# Altium PCB DriveBoard.PcbDoc
Units mm, origin at the board's own origin, x right, y up, seen from the top; angles counter-clockwise.
Board outline 80 x 80 mm, 4 copper layers (Top Layer, PWR, GND, Bottom Layer), stack 0.603 mm thick; 28 components, 34 nets, 141 pads, 36 vias.
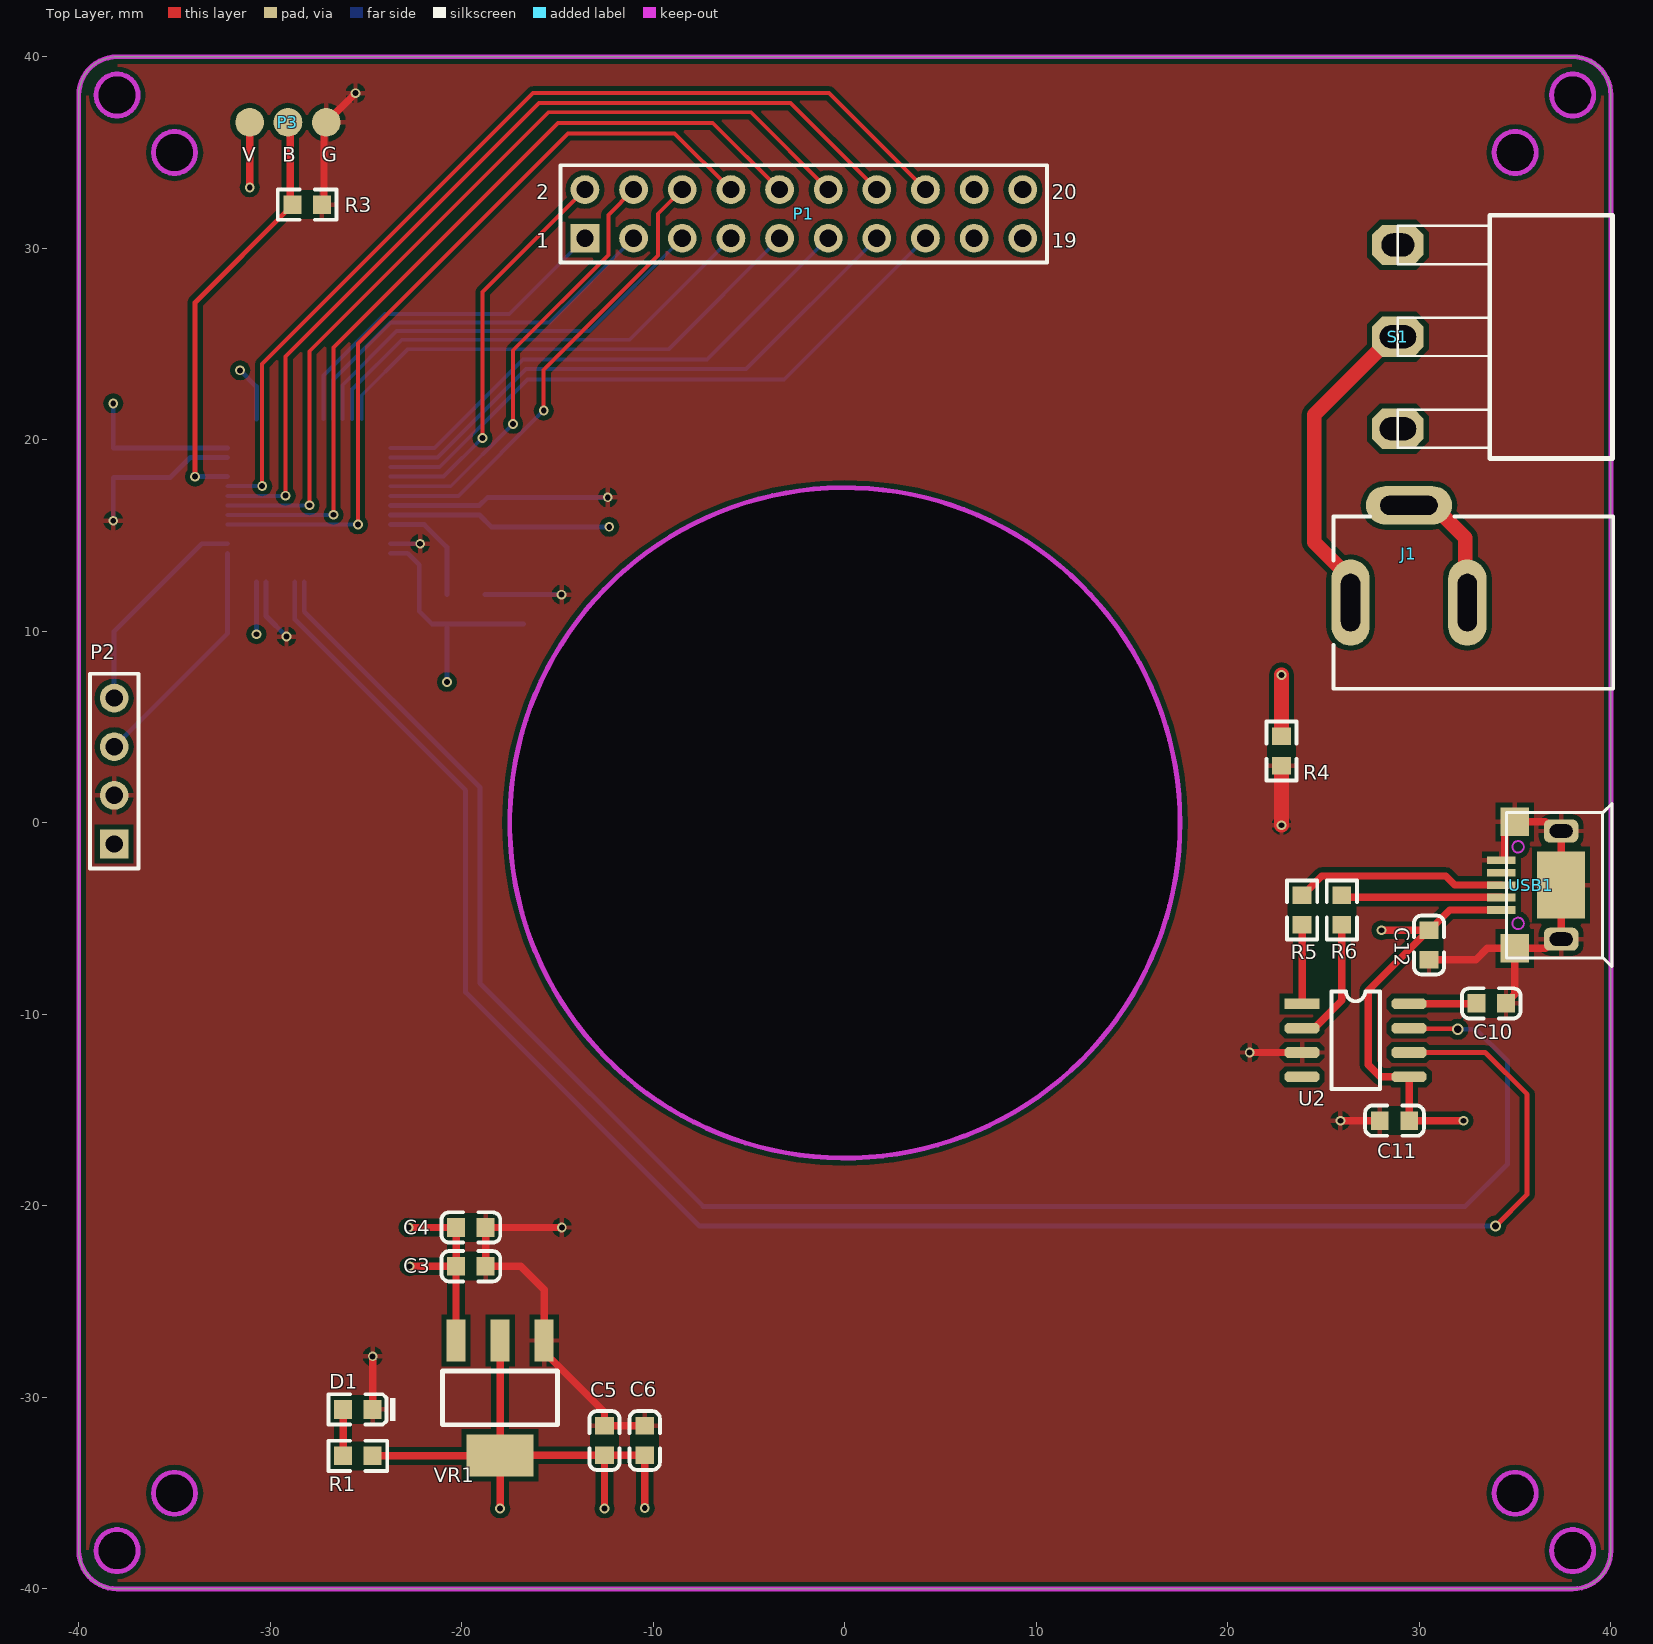
[diagram p0: Top Layer view]
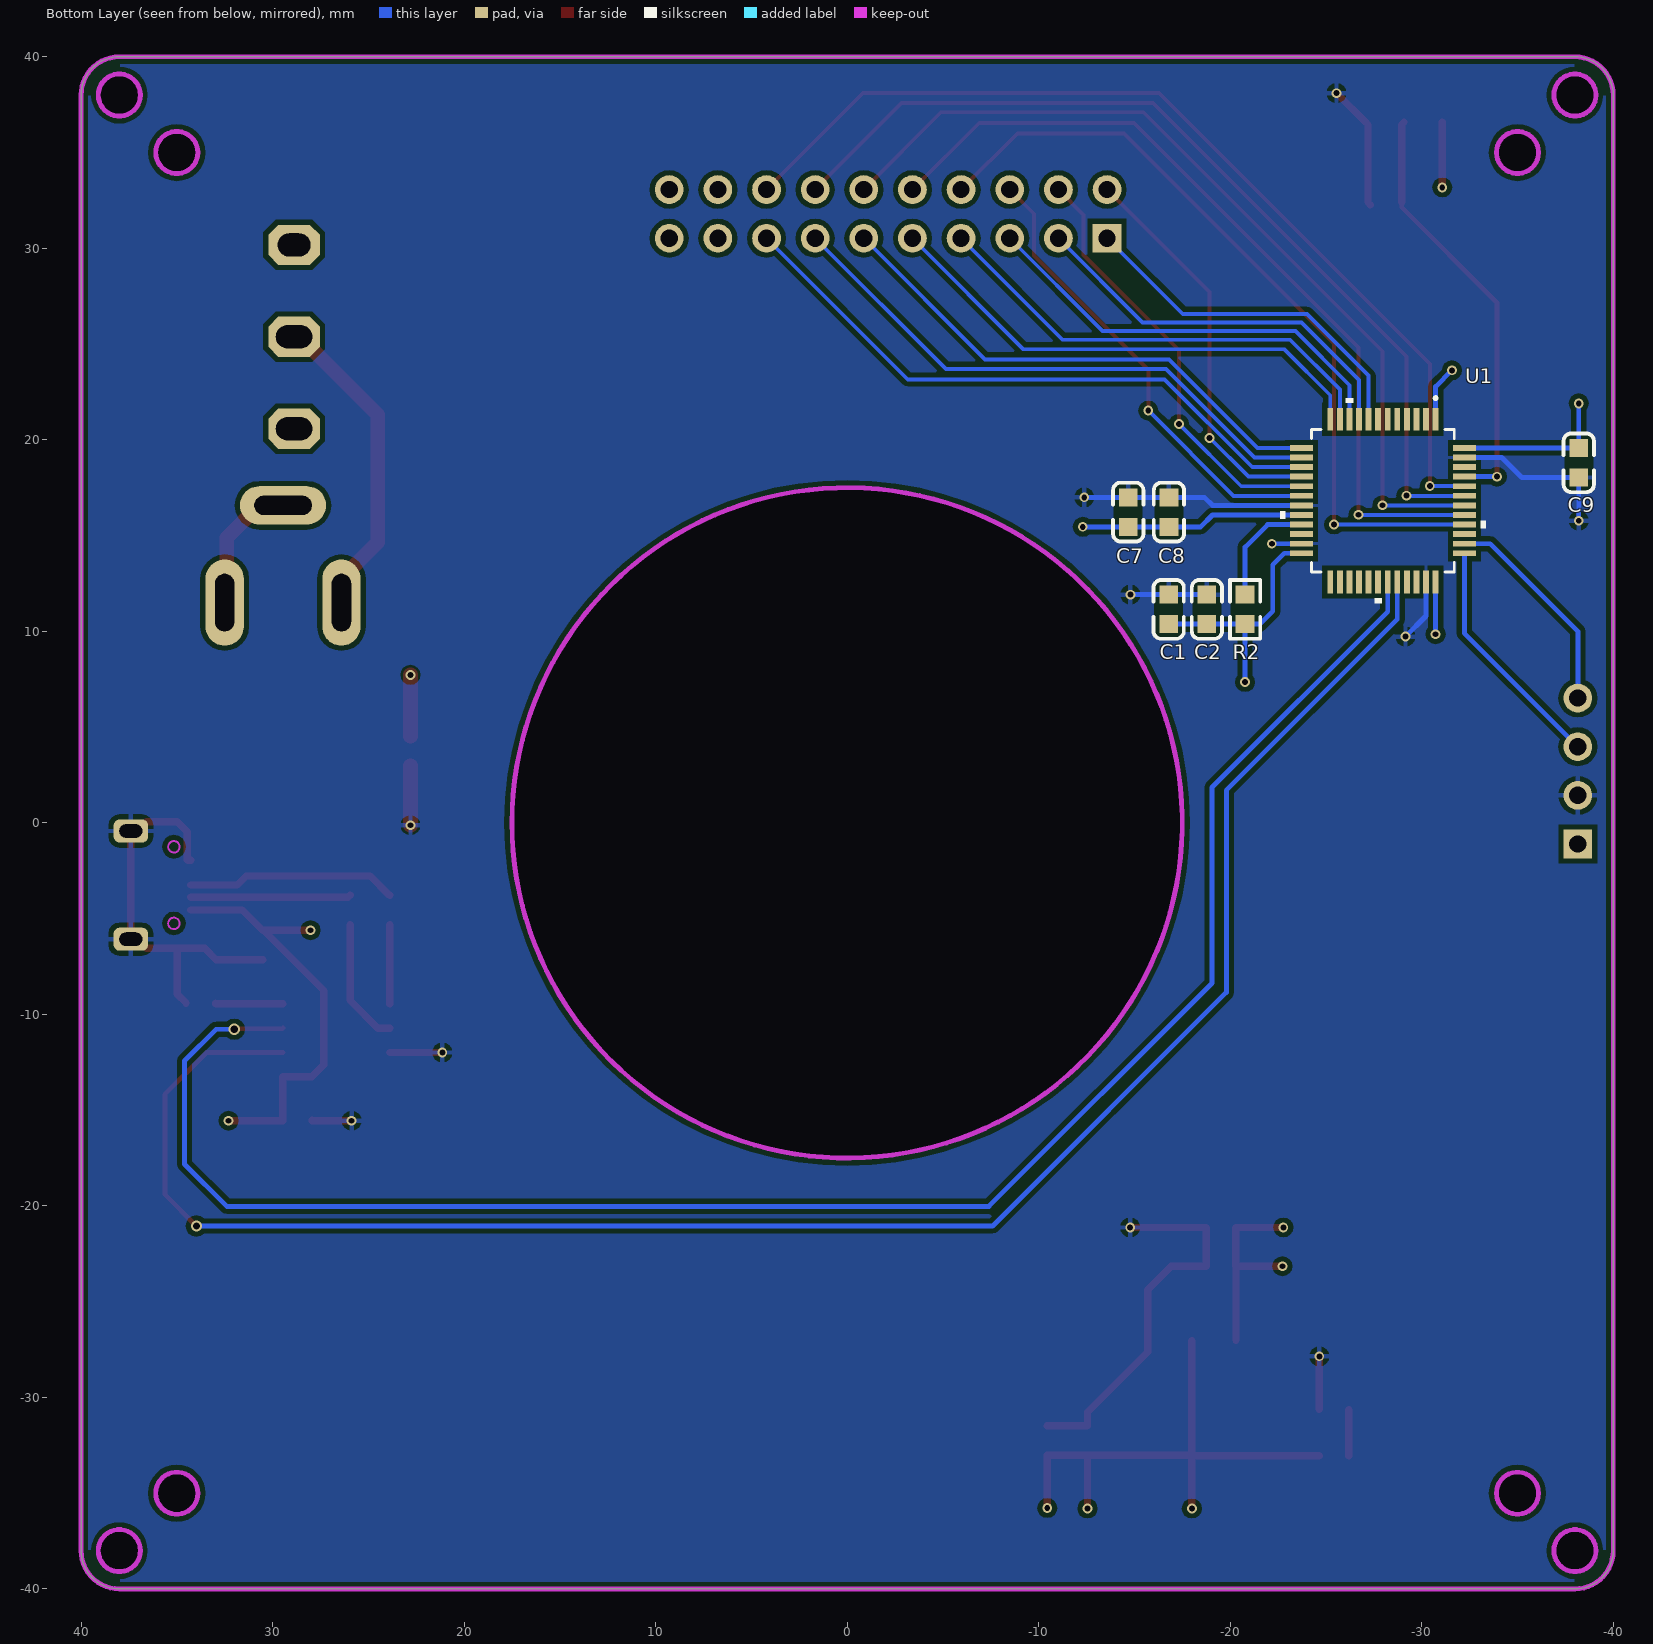
[diagram p1: Bottom Layer view, seen from below]
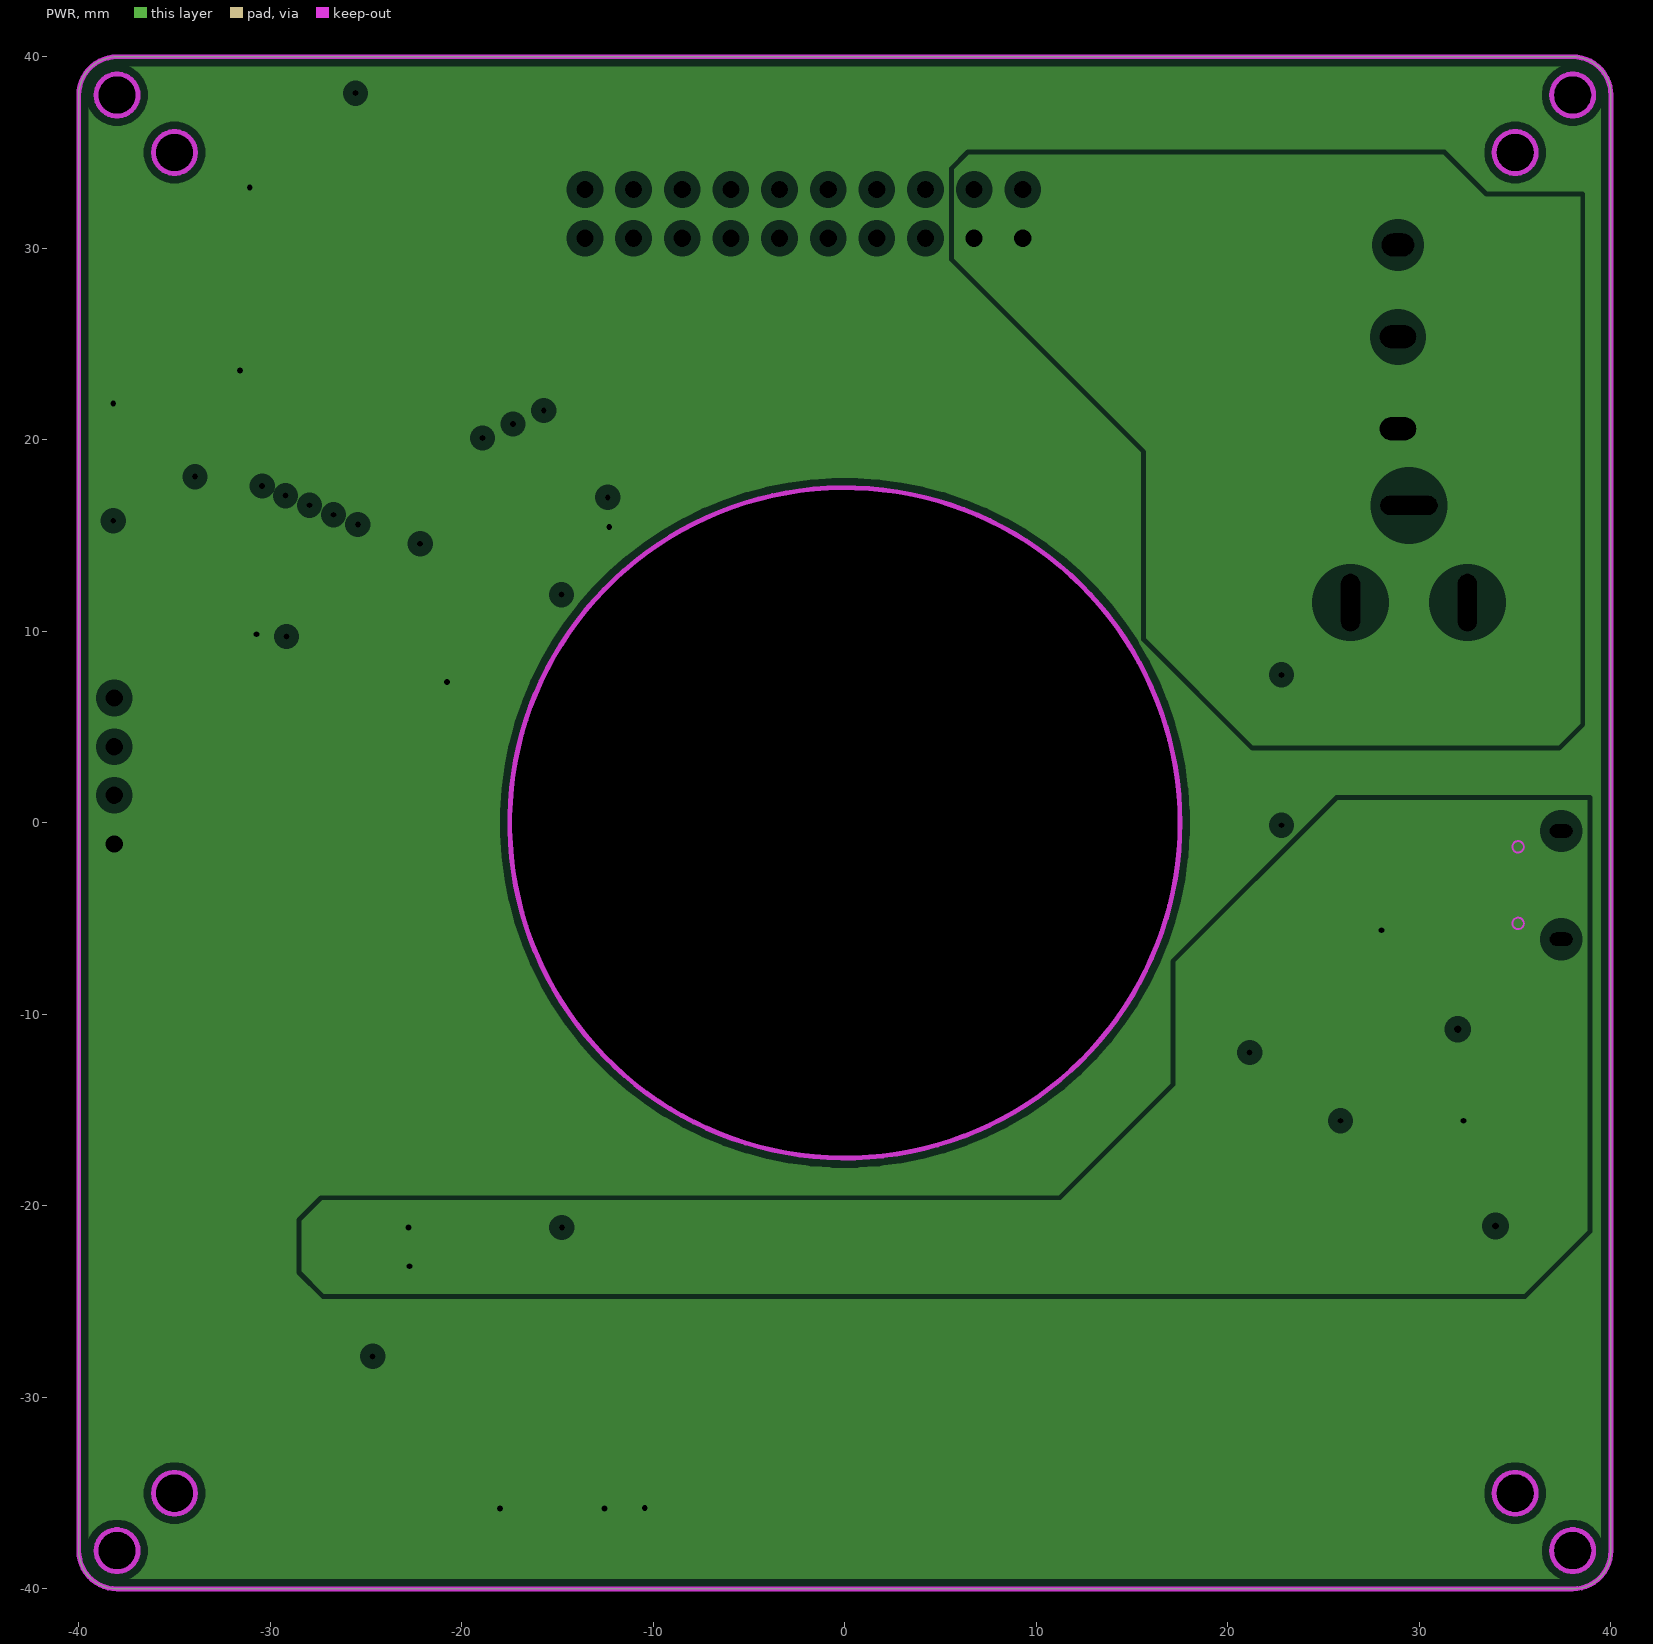
[diagram p2: PWR, clearances drawn from the general rule]
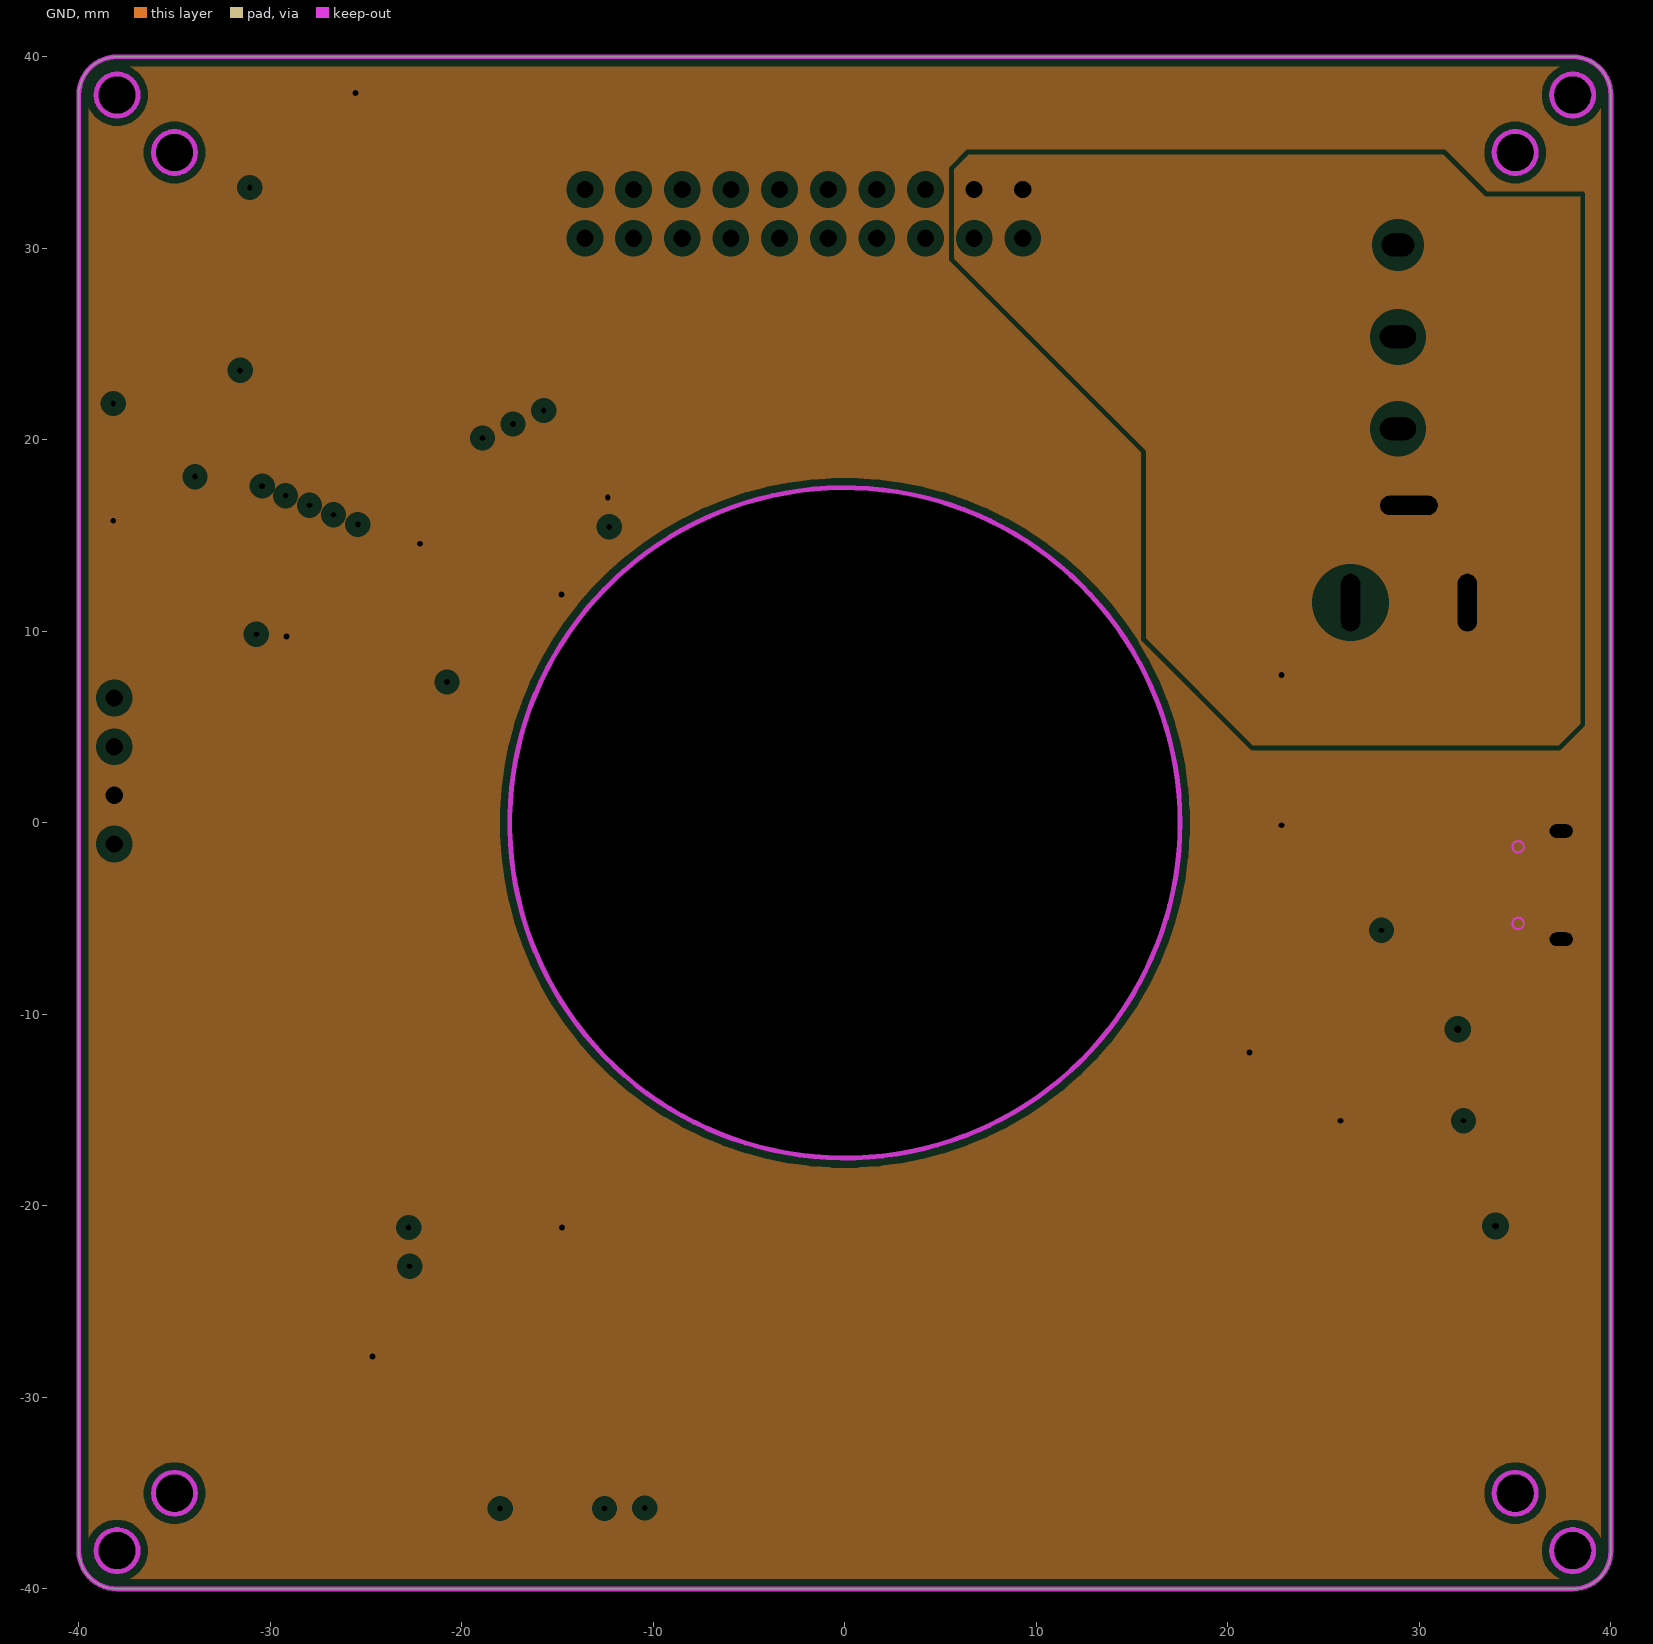
[diagram p3: GND, clearances drawn from the general rule]
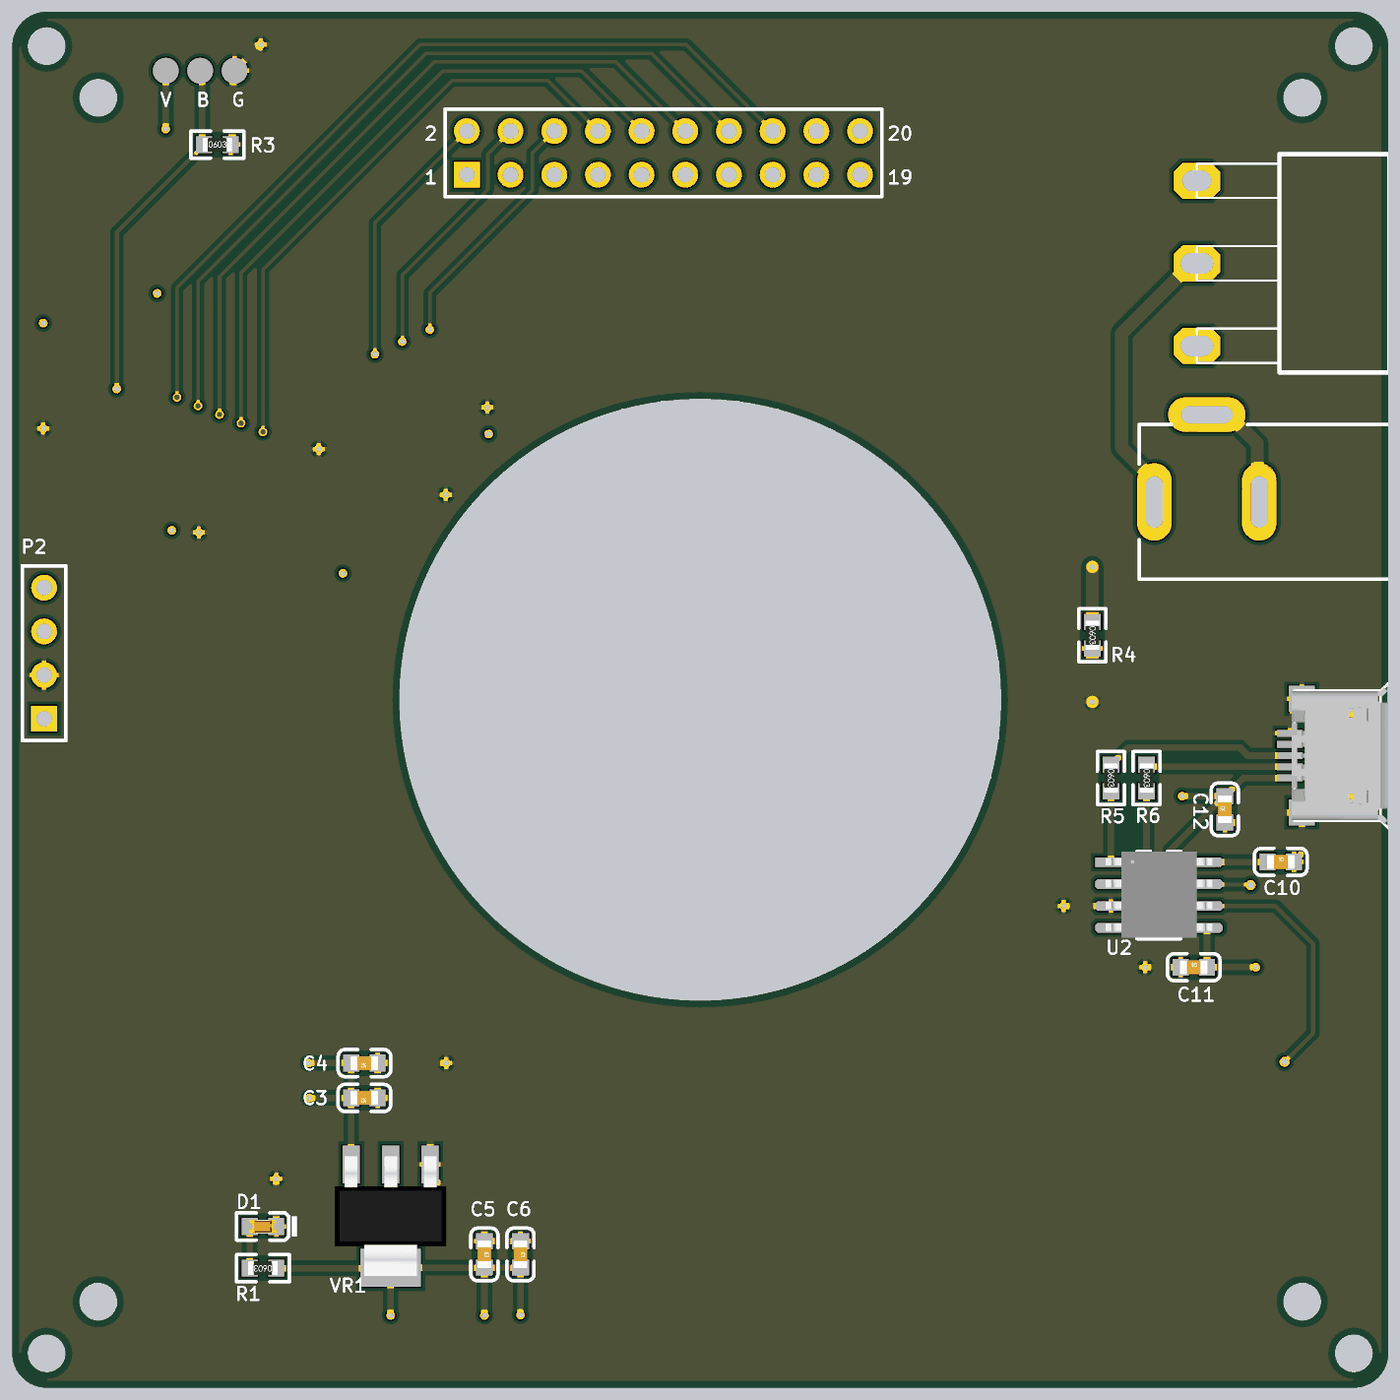
[diagram p4: 3D render of the assembled board from above, using the file's embedded part models]
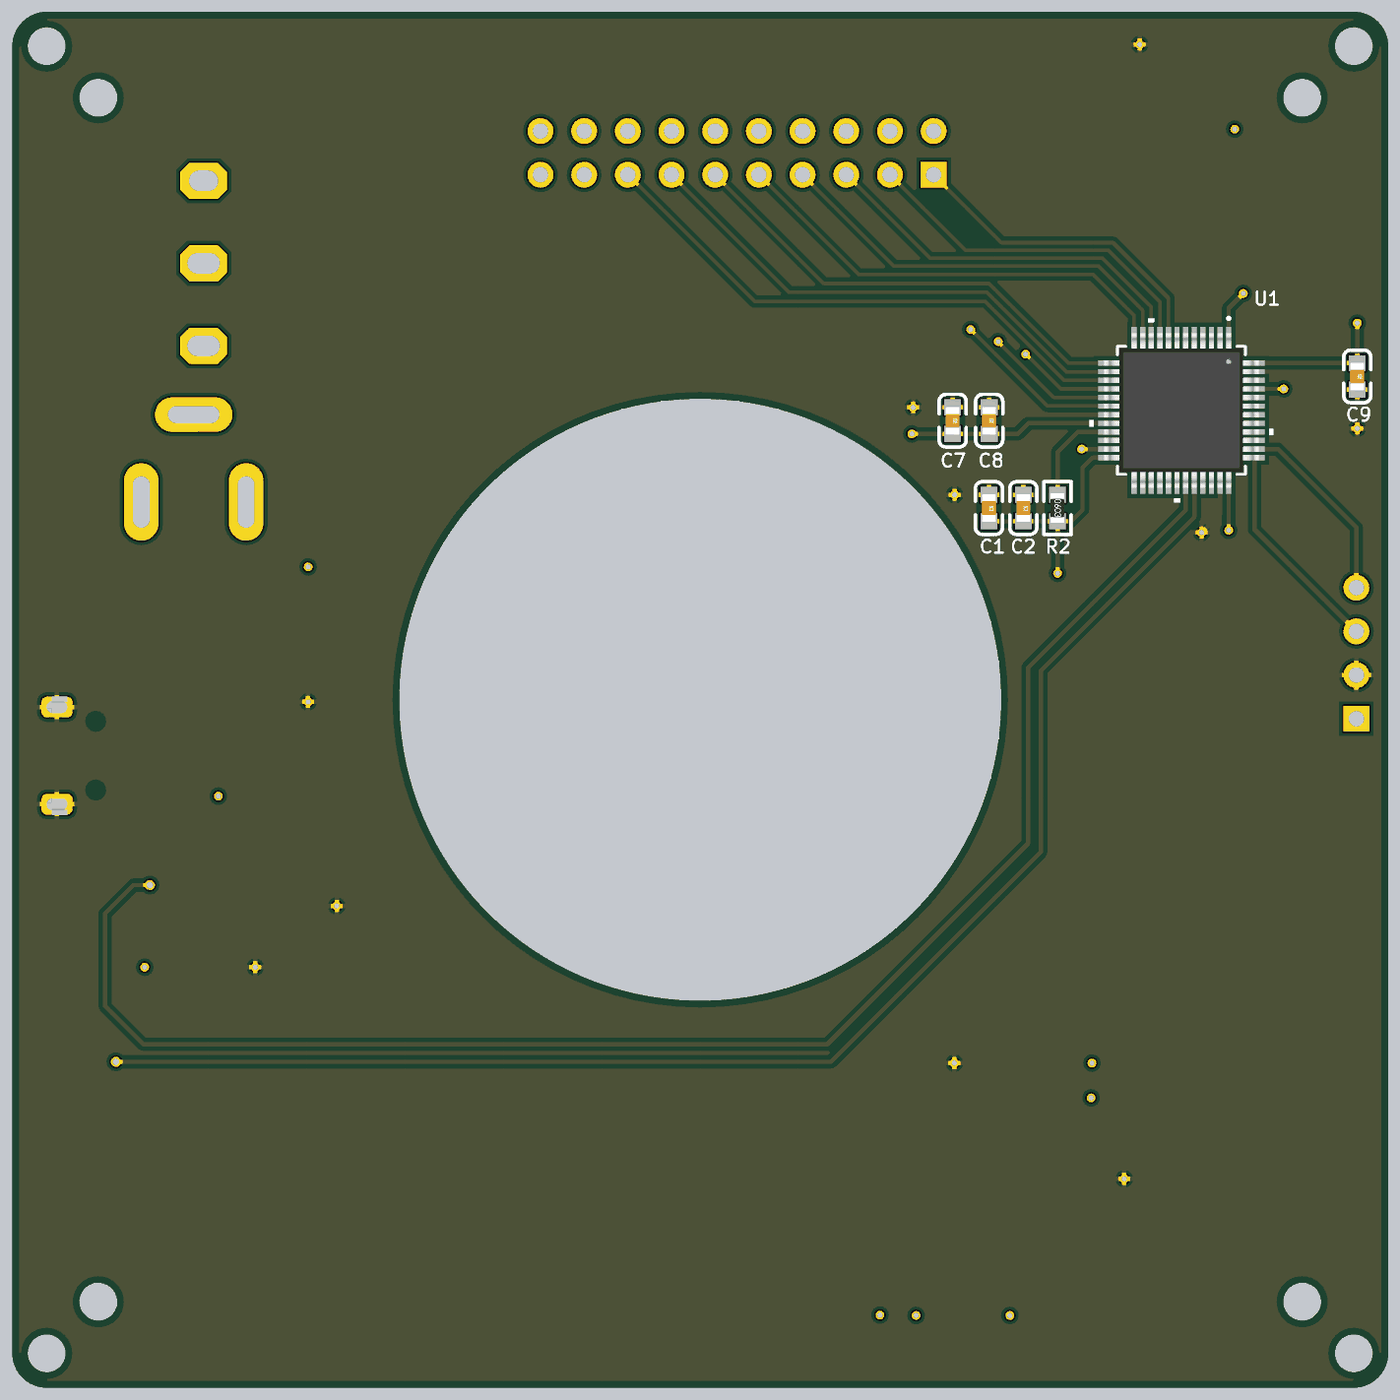
[diagram p5: 3D render of the assembled board from below, using the file's embedded part models]

## Layer stack, top to bottom
Top Solder: solder mask 0.0102, Solder Resist, Dk 3.5
Top Layer: signal copper 0.0356
Dielectric 2: prepreg 0.0711, PP-006, Dk 4.1
PWR: plane copper 0.035, net (Multiple Nets)
Dielectric 1: dielectric 0.32, FR-4, Dk 4.8
GND: plane copper 0.035, net (Multiple Nets)
Dielectric 3: prepreg 0.0711, PP-006, Dk 4.1
Bottom Layer: signal copper 0.0356
Bottom Solder: solder mask 0.0102, Solder Resist, Dk 3.5

## Board outline
-40,-38 ccw(c-38,-38) -38,-40 38,-40 ccw(c38,-38) 40,-38 40,38 ccw(c38,38) 38,40 -38,40 ccw(c-38,38) -40,38
cut-out: -17.5,0 ccw(c0,0) 0,-17.5 ccw(c0,0) 17.5,0 ccw(c0,0) 0,17.5 ccw(c0,0)
cut-out: 33.9,35 ccw(c35,35) 35,33.9 ccw(c35,35) 36.1,35 ccw(c35,35) 35,36.1 ccw(c35,35)
cut-out: 36.9,38 ccw(c38,38) 38,36.9 ccw(c38,38) 39.1,38 ccw(c38,38) 38,39.1 ccw(c38,38)
cut-out: 36.9,-38 ccw(c38,-38) 38,-39.1 ccw(c38,-38) 39.1,-38 ccw(c38,-38) 38,-36.9 ccw(c38,-38)
cut-out: 33.9,-35 ccw(c35,-35) 35,-36.1 ccw(c35,-35) 36.1,-35 ccw(c35,-35) 35,-33.9 ccw(c35,-35)
cut-out: -39.1,-38 ccw(c-38,-38) -38,-39.1 ccw(c-38,-38) -36.9,-38 ccw(c-38,-38) -38,-36.9 ccw(c-38,-38)
cut-out: -36.1,-35 ccw(c-35,-35) -35,-36.1 ccw(c-35,-35) -33.9,-35 ccw(c-35,-35) -35,-33.9 ccw(c-35,-35)
cut-out: -38,36.9 cw(c-38,38) -39.1,38 cw(c-38,38) -38,39.1 cw(c-38,38) -36.9,38 cw(c-38,38)
cut-out: -35,33.9 cw(c-35,35) -36.1,35 cw(c-35,35) -35,36.1 cw(c-35,35) -33.9,35 cw(c-35,35)

## Design rules (kind name [scope] priority, off if disabled: settings)
Clearance [All] p1: gap=0.152 ignorepadtopadclearanceinfootprint=FALSE
ComponentClearance [All] p1: gap=0 collisioncheckmode=3 verticalgap=0 showdistances=FALSE
MinimumSolderMaskSliver [All] p1: minsoldermaskwidth=0.102
PlaneClearance [All] p1: clearance=0.508
PlaneConnect [All] p1: pad.planeconnectstyle=Relief pad.reliefexpansion=0.508 pad.reliefentries=4 pad.reliefconductorwidth=0.254 pad.reliefairgap=0.254 via.planeconnectstyle=Direct via.reliefexpansion=0.508 via.reliefentries=4 via.reliefconductorwidth=0.254 via.reliefairgap=0.254
PolygonConnect [All] p1: connectstyle=Relief reliefconductorwidth=0.254 reliefentries=4 polygonreliefangle="90 Angle" airgapwidth=0.254
RoutingVias [All] p1: holewidth=0.305 width=0.508 viastyle="Through Hole" minholewidth=0.305 minwidth=0.508 maxholewidth=0.305 maxwidth=0.508
SilkToSilkClearance [All] p1: silktosilkclearance=0
SilkToSolderMaskClearance [IsPad] p1: minsilkscreentomaskgap=0 clearancetoexposedcopper=TRUE
SolderMaskExpansion [All] p1: expansion=0.102 istentingtop=FALSE
Width [All] p1: maxlimit=1.27 minlimit=0.152 preferedwidth=0.203
24 further rules are at their usual default settings.

## Components (designator, comment, footprint, x,y, rotation, side; value= is the part's Value field where it differs from the comment)
C1 "1uF" 0603_C -16.788,11.145 r270 bottom
C2 "0.1uF" 0603_C -18.781,11.145 r270 bottom
C3 "100nF" 0603_C -19.525,-23.15 r180 top
C4 "1uF" 0603_C -19.525,-21.125 r180 top
C5 "100nF" 0603_C -12.55,-32.25 r270 top
C6 "1uF" 0603_C -10.45,-32.25 r270 top
C7 "0.1uF" 0603_C -14.675,16.225 r270 bottom
C8 "1uF" 0603_C -16.8,16.225 r270 bottom
C9 "0.1uF" 0603_C -38.2,18.8 r270 bottom
C10 "100nF" 0603_C 33.75,-9.425 r0 top
C11 "100nF" 0603_C 28.7,-15.55 r0 top
C12 "10uF" 0603_C 30.5,-6.375 r90 top
D1 "翠绿 0603" 0603_LED_S1 -25.425,-30.625 r180 top
J1 "PWRCON" DC-005 25.515,11.5 r0 top
P1 "Header 10X2" HDR2X10 -13.57,30.525 r0 top locked
P2 "Header 4" HDR1X4 -38.15,-1.105 r90 top
P3 "BOOT" BOOT -31.075,36.575 r0 top
R1 "3K" 0603_R -25.425,-33.05 r180 top
R2 "10R" 0603_R -20.775,11.145 r270 bottom
R3 "100K" 0603_R -28.075,32.275 r0 top
R4 "0Ω" LC-0603_R 22.8,3.75 r270 top
R5 "10Ω" 0603_R 23.875,-4.55 r270 top
R6 "10Ω" 0603_R 25.95,-4.55 r270 top
S1 "SW-SPDT" SWITCH_A1 28.875,30.175 r270 top
U1 "STM32G431CBT6" LQFP48-7x7mm -27.975,16.825 r270 bottom
U2 "CH340N" SOP8 23.875,-9.45 r270 top
USB1 "USB-AB" "USB_AB - 5S - B" 39.55,-3.25 r270 top
VR1 "AMS1117-3.3" SOT-223 -18,-30.025 r90 top

## Footprints (in the part's own frame and the unit in brackets; to place one, negate y for a bottom-side part, rotate by r counter-clockwise, add the part's x,y. Pads: shape width x height; smd on the part's side, far side on the other; paste and mask are expansions set on the pad)
0603_C [mm]
  rect 0.93x0.98 smd: 1(-0.77,0) 2(0.77,0)
  silkscreen extent -1.53,-0.79 1.54,0.79, body extent -0.8,-0.4 0.8,0.4, height 0.3
0603_LED_S1 [mm]
  rect 0.93x0.98 smd: A(0.77,0) K(-0.77,0)
  silkscreen extent -1.98,-0.79 1.54,0.79, body extent -0.8,-0.4 0.8,0.4, height 0.6
0603_R [mm]
  rect 0.93x0.98 smd: 1(-0.77,0) 2(0.77,0)
  silkscreen extent -1.53,-0.79 1.54,0.79, body extent -0.85,-0.4 0.85,0.4, height 0.56
BOOT [mm]
  round 1.5 smd: 1(0,0) 2(2,0) 3(4,0)
DC-005 [mm] "DC母座5.5mm"
  oval 2x4.5 hole 1 slot 3 at 90 deg: 1(0.889,0) 2(6.985,0)
  oval 4.5x2 hole 1 slot 3 at 0 deg: 3(3.937,5.08)
  silkscreen extent 0,-4.5 14.6,4.5, body extent 0,-4.44 14.6,4.44, height 11
HDR1X4 [mm] "Connector; Header; 4 Position"
  rect 1.5x1.5 hole 0.9: 1(0,0)
  round 1.5 hole 0.9: 2(2.54,0) 3(5.08,0) 4(7.62,0)
  silkscreen extent -1.27,-1.27 8.89,1.27
HDR2X10 [mm] "Connector; Header; 10x2 Position"
  rect 1.5x1.5 hole 0.9: 1(0,0)
  round 1.5 hole 0.9: 2(0,2.54) 3(2.54,0) 4(2.54,2.54) 5(5.08,0) 6(5.08,2.54) 7(7.62,0) 8(7.62,2.54) 9(10.16,0) 10(10.16,2.54) 11(12.7,0) 12(12.7,2.54) 13(15.24,0) 14(15.24,2.54) 15(17.78,0) 16(17.78,2.54) 17(20.32,0) 18(20.32,2.54) 19(22.86,0) 20(22.86,2.54)
  silkscreen extent -1.27,-1.27 24.13,3.81
LC-0603_R [mm]
  rect 0.93x0.98 smd: 1(-0.77,0) 2(0.77,0)
  silkscreen extent -1.53,-0.79 1.54,0.79, body extent -0.85,-0.4 0.85,0.4, height 0.56
LQFP48-7x7mm [mm]
  rect 1.194x0.305 smd paste+0 mask+0: 1(-4.25,2.75) 2(-4.25,2.25) 3(-4.25,1.75) 4(-4.25,1.25) 5(-4.25,0.75) 6(-4.25,0.25) 7(-4.25,-0.25) 8(-4.25,-0.75) 9(-4.25,-1.25) 10(-4.25,-1.75) 11(-4.25,-2.25) 12(-4.25,-2.75) 25(4.25,-2.75) 26(4.25,-2.25) 27(4.25,-1.75) 28(4.25,-1.25) 29(4.25,-0.75) 30(4.25,-0.25) 31(4.25,0.25) 32(4.25,0.75) 33(4.25,1.25) 34(4.25,1.75) 35(4.25,2.25) 36(4.25,2.75)
  rect 0.305x1.194 smd paste+0 mask+0: 13(-2.75,-4.25) 14(-2.25,-4.25) 15(-1.75,-4.25) 16(-1.25,-4.25) 17(-0.75,-4.25) 18(-0.25,-4.25) 19(0.25,-4.25) 20(0.75,-4.25) 21(1.25,-4.25) 22(1.75,-4.25) 23(2.25,-4.25) 24(2.75,-4.25) 37(2.75,4.25) 38(2.25,4.25) 39(1.75,4.25) 40(1.25,4.25) 41(0.75,4.25) 42(0.25,4.25) 43(-0.25,4.25) 44(-0.75,4.25) 45(-1.25,4.25) 46(-1.75,4.25) 47(-2.25,4.25) 48(-2.75,4.25)
  silkscreen extent -5.43,-5.35 5.35,5.35, body extent -4.5,-4.5 4.5,4.5, height 1.6
SOP8 [mil]
  rect 22x72 smd: 1(0,0)
  oct 22x72 smd: 2(50,0) 3(100,0) 4(150,0) 5(150,220) 6(100,220) 7(50,220) 8(0,220)
  silkscreen extent -25,60 175,160, body extent -25,-12 172,232, height 59
SOT-223 [mm]
  rect 2.2x1 smd: 1(3,-2.3) 2(3,0) 3(3,2.3)
  rect 2.2x3.5 smd: 2(-3,0)
  silkscreen extent -1.4,-3 1.4,3, body extent -3.49,-3.24 3.49,3.24, height 1.64
SWITCH_A1 [mm] "扭子开关"
  oct 2.1x2.7 hole 1.2 slot 1.7 at 90 deg: 1(0,0)
  oct 2.1x2.7 hole 1.2 slot 1.9 at 90 deg: 2(4.8,0) 3(9.6,0)
  silkscreen extent -1.55,0 11.15,11.2
"USB_AB - 5S - B" [mm]
  rect 0.4x1.5 smd: 1(1.3,-5.272) 2(0.65,-5.272) 3(0,-5.272) 4(-0.65,-5.272) 5(-1.3,-5.272)
  rrect50% 1.2x1.8 hole 0.7 slot 1.2 at 90 deg: 6(2.825,-2.15) 7(-2.825,-2.15)
  rect 1.5x1.5 smd: 8(-3.302,-4.572) 9(3.302,-4.572)
  rect 3.5x2.5 smd: 9(0,-2.159)
  Keep-Out Layer circle w0.102: c-2,-4.4 r0.3
  Keep-Out Layer circle w0.102: c2,-4.4 r0.3
  silkscreen extent -4.26,-5 4.26,0.51, body extent -4,-5.15 4,0.45, height 2.8

## Part data
C1 C2 C7 C8 C9: library part "0805 1uF (105) 10% 50V", "贴片电容", Package=0805, SuppliersPartNumber=C28323, ComponentLink1Description=供应商链接, ComponentLink1URL=http://www.szlcsc.com/product/details_29074.html, Supplier=LC
C3 C5 C10 C11 C12: library part "0603 100nF (104) 10% 50V", "贴片电容", Package=0603, SuppliersPartNumber=C14663, ComponentLink1Description=供应商链接, ComponentLink1URL=http://www.szlcsc.com/product/details_15331.html, Supplier=LC
C4 C6: library part "0603 1uF (105) 10% 50V", "贴片电容", Package=0603, SuppliersPartNumber=C15849, ComponentLink1Description=供应商链接, ComponentLink1URL=http://www.szlcsc.com/product/details_16531.html, Supplier=LC
D1: library part "0805 翠绿", "发光二极管", Package=0805, SuppliersPartNumber=C2297, ComponentLink1Description=供应商链接, ComponentLink1URL=http://www.szlcsc.com/product/details_2670.html, Supplier=LC
J1: "直流电源端子", ComponentLink1Description="Manufacturer Link", ComponentLink1URL=http://domino.kycon.com/internet/Products.html, DatasheetDocument=09-May-2002, Published=17-Dec-2003, Publisher="Altium Limited"
P1: "Header, 10-Pin, Dual row", LatestRevisionDate=17-Jul-2002, LatestRevisionNote="Re-released for DXP Platform.", Publisher="Altium Limited"
P2: "Header, 4-Pin", LatestRevisionDate=17-Jul-2002, LatestRevisionNote="Re-released for DXP Platform.", Publisher="Altium Limited"
R1 R2 R3: library part "0805 9.1KΩ (9101) 1%", "贴片电阻", Package=0805, SuppliersPartNumber=C17855, ComponentLink1Description=供应商链接, ComponentLink1URL=http://www.szlcsc.com/product/details_18543.html, Supplier=LC
R4: library part "0603 0Ω (0R0) 1%", "贴片电阻", Package=0603, SuppliersPartNumber=C21189, ComponentLink1Description=供应商链接, ComponentLink1URL=http://www.szlcsc.com/product/details_21903.html, Supplier=LC
R5 R6: library part "0603 10Ω (10R0) 1%", "贴片电阻", Package=0603, SuppliersPartNumber=C22859, ComponentLink1Description=供应商链接, ComponentLink1URL=http://www.szlcsc.com/product/details_23586.html, Supplier=LC
S1: "开关", ComponentLink1Description="Manufacturer Link", ComponentLink1URL=http://www.apem.com, DatasheetDocument=05-Dec-2000, LatestRevisionDate=17-Dec-2003, LatestRevisionNote="Schematic revised, PCB Footprint replaced.", PackageReference=TL36WW15050, Published=24-Mar-1999, Publisher="Altium Limited"
U1: "No Description Available", Built_By=EMA_UL_Team, Copyright="Copyright (C) 2018 Accelerated Designs. All rights reserved", Manufacturer_Part_Number=STM32G431CBT6, RefDes=RefDes, SourceLibrary=Updates_to_database_2020-10-19, Type=DEV, Vendor=STMicroelectronics
U2: "USB to TTL Serial / UART"
USB1: "MicroUSB"
VR1: library part "SOT-223 AMS1117-3.3", "低压差线性稳压(LDO)", Package=SOT-223, SuppliersPartNumber=C6186, ComponentLink1Description=供应商链接, ComponentLink1URL=http://www.szlcsc.com/product/details_6652.html, Supplier=LC

## Via types
v1: diameter 0.508, hole 0.305, Top Layer to Bottom Layer, 34 vias
v2: diameter 0.584, hole 0.381, Top Layer to Bottom Layer, 2 vias

## Nets (pads, with @x,y where several pads share a name; then routed paths per layer and width w, separated by ;. In a path a pad name is that pad's centre, name@x,y a point inside that pad or via, vN(x,y) a via of type N, cw(c..) or ccw(c..) an arc to the next point about the centre after c; other vN are vias at no path point)
BOOT0: P3.2 R3.1 U1.45 | length 22.3
  Top Layer w0.254: v1(-33.925,18.075) -33.925,27.17 -28.96,32.135 R3.1@-28.96,32.39
  Top Layer w0.381: P3.2 -28.96,36.46 R3.1@-28.96,32.39
  Bottom Layer w0.254: v1(-33.925,18.075) U1.45
CON1: P1.1 U1.8 | length 18.9
  Bottom Layer w0.203: U1.8 -27.225,23.35 -24,26.575 -17.52,26.575 P1.1
CON2: P1.3 U1.9 | length 20.8
  Bottom Layer w0.203: U1.9 -26.725,23.125 -23.725,26.125 -15.43,26.125 P1.3
CON3: P1.5 U1.10 | length 22.7
  Bottom Layer w0.203: U1.10 -26.225,22.85 -23.4,25.675 -13.34,25.675 P1.5
CON4: P1.7 U1.11 | length 24.6
  Bottom Layer w0.203: U1.11 -25.725,22.625 -23.125,25.225 -11.25,25.225 P1.7
CON5: P1.9 U1.12 | length 26.5
  Bottom Layer w0.203: U1.12 -25.225,22.325 -22.825,24.725 -9.21,24.725 P1.9
CON6: P1.11 U1.13 | length 27.4
  Bottom Layer w0.203: U1.13 -21.425,19.575 -16.8,24.2 -7.195,24.2 P1.11
CON7: P1.13 U1.14 | length 30.1
  Bottom Layer w0.203: U1.14 -21.275,19.075 -16.65,23.7 -5.155,23.7 P1.13
CON8: P1.15 U1.15 | length 32.9
  Bottom Layer w0.203: U1.15 -21.15,18.575 -16.575,23.15 -3.165,23.15 P1.15
CON9: P1.2 U1.16 | length 20.8
  Top Layer w0.203: v1(-18.916,20.091) -18.916,27.719 P1.2
  Bottom Layer w0.203: U1.16 -20.95,18.075 -18.934,20.091 v1(-18.916,20.091) v1@-18.907,20.1
CON10: P1.4 U1.17 | length 22.6
  Top Layer w0.203: v1(-17.325,20.825) -17.325,24.675 -12.35,29.65 -12.35,31.745 P1.4
  Bottom Layer w0.203: U1.17 -20.575,17.575 v1(-17.325,20.825)
CON11: P1.6 U1.18 | length 24.4
  Top Layer w0.203: v1(-15.725,21.525) -15.725,23.65 -9.75,29.625 -9.75,31.805 P1.6
  Bottom Layer w0.203: U1.18 -20.175,17.075 v1(-15.725,21.525)
CON12: P1.8 U1.40 | length 41.5
  Top Layer w0.203: v1(-25.425,15.575) -25.425,25.025 -14.45,36 -8.885,36 P1.8
  Bottom Layer w0.203: U1.40 v1(-25.425,15.575)
CON13: P1.10 U1.41 | length 43.9
  Top Layer w0.203: v1(-26.7,16.083) -26.7,24.825 -14.975,36.55 -6.895,36.55 P1.10
  Bottom Layer w0.203: U1.41 -26.708,16.075 v1(-26.7,16.083)
CON14: P1.12 U1.42 | length 46.2
  Top Layer w0.203: v1(-27.95,16.583) -27.95,24.625 -15.475,37.1 -4.905,37.1 P1.12
  Bottom Layer w0.203: U1.42 -27.958,16.575 v1(-27.95,16.583)
CON15: P1.14 U1.43 | length 48.5
  Top Layer w0.203: v1(-29.2,17.083) -29.2,24.35 -15.975,37.575 -2.84,37.575 P1.14
  Bottom Layer w0.203: U1.43 -29.208,17.075 v1(-29.2,17.083)
CON16: P1.16 U1.44 | length 50.8
  Top Layer w0.203: v1(-30.425,17.583) -30.425,23.95 -16.275,38.1 -0.825,38.1 P1.16
  Bottom Layer w0.203: U1.44 -32.221,17.579 -30.429,17.579 v1(-30.425,17.583)
GND: C1.1 C2.1 C3.1 C4.1 C5.1 C6.1 C7.1 C8.1 C9.2 C10.2 C11.1 C12.1 D1.K P2.2 P3.3 R3.2 R4.2 U1.19 U1.23 U1.35 U1.47 U2.3 USB1.5 USB1.6 USB1.7 USB1.8 USB1.9 VR1.1 | length 87.4
  Top Layer w0.381: R3.2 -27.19,32.39 -27.19,36.46 P3.3 v1(-25.55,38.1) ; D1.K v1(-24.655,-27.855) ; v1(-14.775,-21.125) C4.1 C3.1 -16.925,-23.15 -15.7,-24.375 VR1.1 -15.7,-27.625 -12.55,-30.775 C5.1 C6.1 ; v1(21.135,-11.99) U2.3 ; v1(25.875,-15.55) C11.1 C11.1@27.93,-15.525 ; C12.1 32.955,-7.145 33.548,-6.552 USB1.9@34.978,-6.552 ; USB1.5 34.447,-1.95 34.456,-1.941 34.456,-0.47 USB1.8 36.564,0.052 37.041,-0.425 USB1.7 37.4,-3.241 37.391,-3.25 37.4,-3.259 USB1.6 37.041,-6.075 36.564,-6.552 USB1.9@34.978,-6.552 ; C10.2 34.52,-9.4 34.978,-8.942 USB1.9@34.978,-6.552
  Top Layer w0.762: v1(22.8,-0.125) R4.2
  Bottom Layer w0.254: v1(-38.2,15.775) C9.2 -35.22,18.03 -34.175,19.075 U1.47 ; U1.35 -30.225,10.8 v1(-29.15,9.725) ; U1.23 v1(-22.175,14.575) ; U1.19 -19.075,16.575 -18.655,16.995 C8.1 C7.1 v1(-12.38,16.995) ; C2.1 C1.1 v1(-14.79,11.915)
LED_G: J1.2 J1.3 P1.18 P1.20 R4.1 | length 10.3
  Top Layer w0.762: R4.1 v1(22.8,7.725) ; J1.3 30.702,16.58 32.389,14.893 32.389,11.611 J1.2
LED_V: P1.17 P1.19 S1.3
MCU_RX: U1.32 U2.6 | length 98.6
  Top Layer w0.254: U2.6 33.44,-11.99 35.625,-14.175 35.625,-19.4 v2(33.975,-21.05)
  Bottom Layer w0.254: U1.32 -28.725,10.625 -19.8,1.7 -19.8,-8.85 -7.6,-21.05 v2(33.975,-21.05)
MCU_TX: U1.31 U2.7 | length 95.4
  Top Layer w0.254: U2.7 29.49,-10.747 31.973,-10.747 v2(32,-10.775)
  Bottom Layer w0.254: U1.31 -28.225,11.025 -19.05,1.85 -19.05,-8.375 -7.4,-20.025 32.391,-20.025 34.6,-17.816 34.6,-12.425 32.95,-10.775 v2(32,-10.775)
NetC10_1: C10.1 U2.8 | length 3.5
  Top Layer w0.381: U2.8 29.475,-9.437 32.968,-9.437 C10.1
NetD1_A: D1.A R1.2 | length 2.4
  Top Layer w0.381: R1.2 D1.A
NetJ1_1: J1.1 S1.2 | length 16.7
  Top Layer w0.762: J1.1 26.404,12.75 24.5,14.654 24.5,21.3 28.575,25.375 S1.2
NetR2_1: R2.1 U1.21 | length 5.9
  Bottom Layer w0.254: U1.21 -21.95,15.575 -20.775,14.4 R2.1
NetR5_1: R5.1 USB1.3 | length 11
  Top Layer w0.381: R5.1 23.9,-3.78 24.905,-2.775 31.375,-2.775 31.85,-3.25 USB1.3
NetR6_1: R6.1 USB1.2 | length 8.4
  Top Layer w0.381: R6.1 26.06,-3.891 34.268,-3.891 USB1.2
SWCLK: P2.4 U1.38 | length 11.3
  Bottom Layer w0.254: P2.4 -38.15,10 -33.575,14.575 U1.38
SWDIO: P2.3 U1.37 | length 12.6
  Bottom Layer w0.254: P2.3 -32.225,9.9 U1.37
UD+: R5.2 U2.1 | length 4.1
  Top Layer w0.381: U2.1 R5.2
UD-: R6.2 U2.2 | length 6.6
  Top Layer w0.381: U2.2 24.51,-10.72 25.95,-9.28 R6.2
VBUS: C3.2 C4.2 C11.2 C12.2 U2.5 USB1.1 VR1.3 | length 33.4
  Top Layer w0.381: v1(-22.775,-21.125) C4.2 C3.2 ; v1(-22.725,-23.15) C3.2 ; VR1.3 -20.298,-27.022 -20.298,-23.152 C3.2 ; v1(28.02,-5.605) C12.2@30.475,-5.605 ; v1(32.3,-15.55) C11.2 29.47,-13.267 U2.5 27.96,-13.26 27.325,-12.625 27.325,-8.755 C12.2@30.475,-5.605 ; USB1.1 31.58,-4.55 30.525,-5.605 C12.2 C12.2@30.475,-5.605
VCC3.3: C1.2 C2.2 C5.2 C6.2 C7.2 C8.2 C9.1 P2.1 P3.1 R1.1 R2.2 U1.1 U1.20 U1.24 U1.36 U1.48 VR1.2 | length 70.5
  Top Layer w0.381: v1(-31.075,33.175) P3.1 ; R1.1 -18.025,-33.05 VR1.2@-18,-33.025 ; v1(-18,-35.8) VR1.2@-18,-33.025 ; VR1.2@-18,-27.025 VR1.2@-18,-33.025 ; v1(-12.55,-35.8) C5.2 ; v1(-10.45,-35.775) C6.2 C5.2 ; VR1.2@-18,-33.025 -17.995,-33.02 C5.2
  Bottom Layer w0.254: v1(-38.2,21.9) C9.1 -38.195,19.575 U1.48 ; v1(-31.575,23.625) -30.725,22.775 U1.1 ; v1(-30.725,9.85) U1.36 ; U1.24 -22.825,14.075 -22.225,13.475 -22.225,11.05 -21.55,10.375 R2.2 ; U1.20 -19.075,16.075 -18.455,15.455 C8.2 C7.2 v1(-12.305,15.455) ; v1(-20.775,7.35) R2.2 ; C1.2 C2.2 R2.2
pads on no net: S1.1 U1.2 U1.3 U1.4 U1.5 U1.6 U1.7 U1.22 U1.25 U1.26 U1.27 U1.28 U1.29 U1.30 U1.33 U1.34 U1.39 U1.46 U2.4 USB1.4

## Polygon pours and split planes (outlines as drawn)
GND on Bottom Layer "GND_L04_P001" (solid, remove dead copper, pour order 1): -40,40 -40,-40 40,-40 40,40
GND on Top Layer "GND_L01_P000" (solid, remove dead copper, pour order 0): -40,40 -40,-40 40,-40 40,40
GND on GND (split plane): 231 vertices, not listed, extent -39.49,-39.49 39.49,39.49
LED_G on GND (split plane): 33.408,32.733 33.45,32.705 33.5,32.696 38.396,32.696 38.396,5.179 37.246,4.029 21.379,4.029 21.329,4.029 15.729,9.629 15.729,19.375 15.72,19.425 15.692,19.467 5.704,29.454 5.704,34.121 6.479,34.896 31.246,34.896
VCC3.3 on PWR (split plane): 231 vertices, not listed, extent -39.49,-39.49 39.49,39.49
VBUS on PWR (split plane): 38.771,-21.296 35.471,-24.596 -27.196,-24.596 -28.371,-23.421 -28.371,-20.779 -27.296,-19.704 11.225,-19.704 11.275,-19.695 11.317,-19.667 17.217,-13.767 17.245,-13.725 17.254,-13.675 17.254,-7.279 25.729,1.196 38.771,1.196
LED_V on PWR (split plane): 33.408,32.733 33.45,32.705 33.5,32.696 38.396,32.696 38.396,5.179 37.246,4.029 21.329,4.029 15.729,9.629 15.729,19.375 15.72,19.425 15.692,19.467 6.892,28.267 5.704,29.454 5.704,34.121 6.479,34.896 31.246,34.896

## Keep-outs
Keep-Out Layer:
  circle w0.254: c0,0 r17.5
  circle w0.254: c35,-35 r1.1
  circle w0.254: c-38,38 r1.1
  circle w0.254: c35,35 r1.1
  circle w0.254: c-38,-38 r1.1
  circle w0.254: c38,38 r1.1
  circle w0.254: c-35,-35 r1.1
  circle w0.254: c38,-38 r1.1
  circle w0.254: c-35,35 r1.1
  lines w0.254: -40,-38 ccw(c-38,-38) -38,-40 38,-40 ccw(c38,-38) 40,-38 40,38 ccw(c38,38) 38,40 -38,40 ccw(c-38,38) -40,38 -40,-38

## Other copper
PWR (plane layer: these items are gaps in the copper):
  lines w0.254: -28.5,-23.475 -27.25,-24.725 35.525,-24.725 38.9,-21.35 38.9,1.325 25.675,1.325 17.125,-7.225 17.125,-13.675 11.225,-19.575 -23.675,-19.575 -27.35,-19.575 -28.5,-20.725 -28.5,-23.475 ; 5.575,29.4 6.8,28.175 15.6,19.375 15.6,9.575 21.275,3.9 37.3,3.9 38.525,5.125 38.525,32.825 33.5,32.825 31.3,35.025 6.425,35.025 5.575,34.175 5.575,29.4
GND (plane layer: these items are gaps in the copper):
  lines w0.254: 5.575,29.4 5.575,34.175 6.425,35.025 31.3,35.025 33.5,32.825 38.525,32.825 38.525,5.125 37.3,3.9 21.379,3.9 21.275,3.9 15.6,9.575 15.6,19.375 5.575,29.4

## Silkscreen, mask and mechanical layers (free items; w line width, h text height)
Mechanical 1:
  circle w0.254: c0,0 r17.5
  circle w0.254: c-35,35 r1.1
  circle w0.254: c35,35 r1.1
  circle w0.254: c-35,-35 r1.1
  circle w0.254: c35,-35 r1.1
  circle w0.254: c-38,38 r1.1
  circle w0.254: c-38,-38 r1.1
  circle w0.254: c38,-38 r1.1
  circle w0.254: c38,38 r1.1
  lines w0.254: -40,-38 ccw(c-38,-38) -38,-40 38,-40 ccw(c38,-38) 40,-38 40,38 ccw(c38,38) 38,40 -38,40 ccw(c-38,38) -40,38 -40,-38

## Text inside footprints (layer, text, board x,y; h text height)
P1: Top Overlay "20" at 10.814,32.557 h0.76; Top Overlay "19" at 10.814,30.017 h0.76; Top Overlay "1" at -16.11,30.017 h0.76; Top Overlay "2" at -16.11,32.557 h0.76
P3: Top Overlay "V" at -31.475,34.525 h0.76; Top Overlay "B" at -29.375,34.525 h0.76; Top Overlay "G" at -27.325,34.525 h0.76